# EAGLE board Clock Extension (EAGLE 7.6.0)
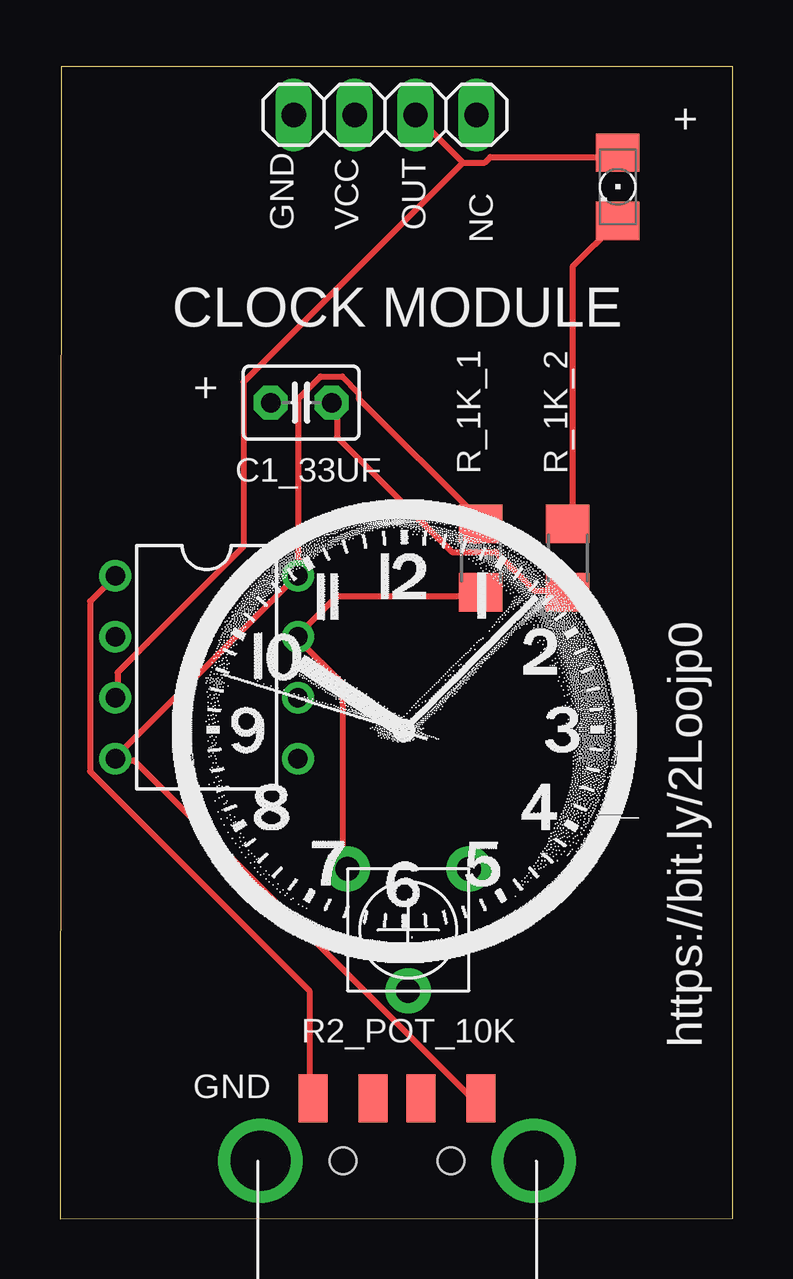
[diagram p0: board, top side]
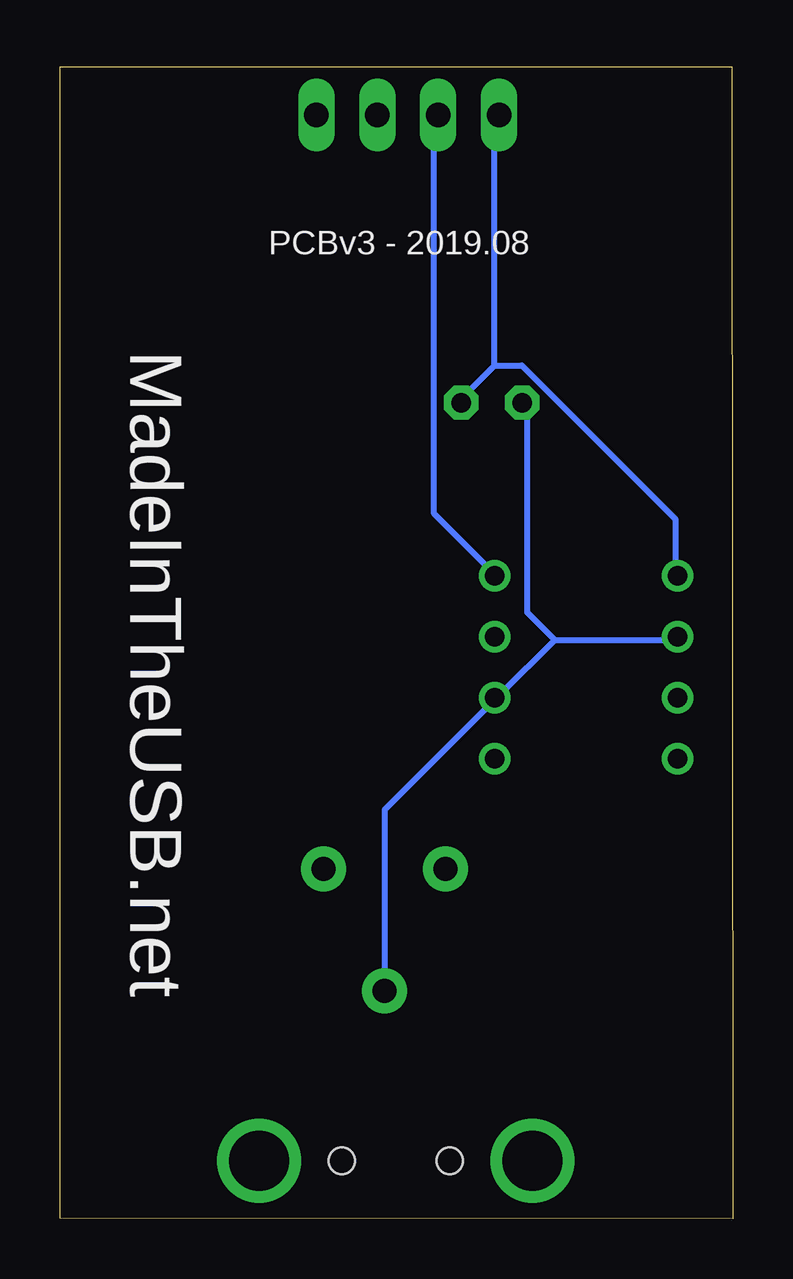
[diagram p1: board, bottom side, seen from below]

Size 28.05 x 48.01 mm. Coordinates in mm from the lower left corner, seen from the top.
Outline: 0,0 28.05,0.01 28.05,48.01 0.05,48.01 0,0
Copper layers (1*16): Top 0.035mm / dielectric 1.5mm / Bottom 0.035mm
Design rules "default": minimum track width 10mil, minimum drill 24mil, track to track 8mil, track to pad 8mil, pad to pad 8mil, via to via 8mil, smd to smd 8mil, copper to edge 40mil, drill to drill 8mil, minimum pad ring 10mil, minimum via ring 8mil, stop-mask expansion 4mil, vias tented up to drill 0mil, thermal gap 10mil

## Footprints (pad centres in the part's own frame; a part is rotated, then mirrored left to right if it is on the bottom)
C025-030X050 = drill 0.813 pad 1.422 octagon: 1 -1.27,0; 2 1.27,0
1X04 = drill 1.016 long: 1 -3.81,0; 2 -1.27,0; 3 1.27,0; 4 3.81,0
1206 = smd 1.6 x 1.803: A -1.422,0; C 1.422,0
TRIM_POT_PTH = drill 1 pad 1.88: 1 -2.54,-2.54; 2 0,2.54; 3 2.54,-2.54
R1206 = smd 1.6 x 1.803: 1 -1.422,0; 2 1.422,0
DIL08 = drill 0.813 pad 1.27: 1 -3.81,-3.81; 2 -1.27,-3.81; 3 1.27,-3.81; 4 3.81,-3.81; 5 3.81,3.81; 6 1.27,3.81; 7 -1.27,3.81; 8 -3.81,3.81
MOLEX_480371000 = smd 1.2 x 2: 1 3.5,2.6; 2 1,2.6; 3 -1,2.6; 4 -3.5,2.6 | drill 2.5: M1 -5.7,0; M2 5.7,0 | hole 1.1: -2.25,0; 2.25,0

## Placement (x,y rotation side)
C1_33UF  [C025-030X050]  10.05,34.01 180 top
JP1  [1X04]  13.55,46.01 0 top
LED_OUTPUT  [1206]  23.25,43.01 270 top
R2_POT_10K  [TRIM_POT_PTH]  14.52,12.03 180 top
R_1K_1  [R1206]  17.54,27.53 90 top
R_1K_2  [R1206]  21.17,27.53 90 top
T555_CLOCK  NE555N  [DIL08]  6.12,22.98 270 top
X1  USB-A  [MOLEX_480371000]  14.05,2.41 0 top

## Library data of the parts
C1_33UF LED_OUTPUT R_1K_1 R_1K_2 X1 = adafruit
JP1 = pinhead
R2_POT_10K = SparkFun-Electromechanical
T555_CLOCK = linear

## Nets
GND: C1_33UF.1 JP1.1 R_1K_2.1 T555_CLOCK.1 X1.4
N$1: R2_POT_10K.3 R_1K_1.1 T555_CLOCK.7
N$5: LED_OUTPUT.C R_1K_2.2
THRESHOLD: C1_33UF.2 R2_POT_10K.2 T555_CLOCK.2 T555_CLOCK.6
TMR555_OUTPUT: JP1.3 LED_OUTPUT.A T555_CLOCK.3
TMR555_OUTPUT_REVERSE: JP1.4
VCC: JP1.2 R_1K_1.2 T555_CLOCK.4 T555_CLOCK.8 X1.1

## Tracks (layer width: path | path; a pad name or v marks a point on that pad's centre or on a via)
GND
  Top 0.254: X1.4 10.4,5.15 10.4,9.5 1.25,18.64 1.25,25.73 2.17,26.64 T555_CLOCK.1 | R_1K_2.1 21.14,26.18 19.77,26.18 18.17,27.78 16.34,27.78 11.54,32.58 11.54,33.96 C1_33UF.1
  Bottom 0.254: 9.94,35.56 9.94,45.84 JP1.1 | 9.94,35.56 11.31,34.18 C1_33UF.1 | 9.94,35.56 8.8,35.56 2.4,29.16 2.4,26.87 T555_CLOCK.1
N$1
  Top 0.254: R_1K_1.1 17.49,25.96 11.54,25.96 9.94,24.35 T555_CLOCK.7 9.94,24.13 11.77,22.3 11.77,14.75 R2_POT_10K.3
N$5
  Top 0.254: R_1K_2.2 21.37,29.16 21.37,39.67 23.2,41.5 LED_OUTPUT.C
THRESHOLD
  Bottom 0.254: 7.43,24.13 2.4,24.13 T555_CLOCK.2 | 7.43,24.13 9.71,21.84 T555_CLOCK.6 9.94,21.61 14.51,17.04 14.51,9.5 R2_POT_10K.2 | 7.43,24.13 8.57,25.27 8.57,33.96 C1_33UF.2
TMR555_OUTPUT
  Top 0.254: 16.8,44.01 17.71,44.01 17.94,44.24 23.2,44.24 LED_OUTPUT.A | 16.8,44.01 14.97,45.84 JP1.3 | 16.8,44.01 7.66,34.87 7.66,28.01 2.4,22.75 2.4,21.84 T555_CLOCK.3
VCC
  Top 0.254: R_1K_1.2 17.49,29.16 12.46,34.18 12.46,34.41 11.77,35.1 10.86,35.1 9.94,34.18 9.94,26.87 T555_CLOCK.8 9.71,26.64 2.4,19.33 T555_CLOCK.4 2.4,19.1 3.08,19.1 17.03,5.15 17.49,5.15 X1.1
  Bottom 0.254: JP1.2 12.46,45.84 12.46,29.38 9.94,26.87 T555_CLOCK.8

## Text on the board
tNames: + | NC | GND | VCC | OUT | CLOCK MODULE | + | https://bit.ly/2Loojp0 | GND
bNames: PCBv3 - 2019.08 | MadeInTheUSB.net